# Altium PCB pico_v1.PcbDoc
Units mm, origin at the board's own origin, x right, y up, seen from the top; angles counter-clockwise.
Board outline 73.79 x 82.42 mm, 2 copper layers (Top Layer, Bottom Layer); 5 components, 40 nets, 94 pads, 12 vias.
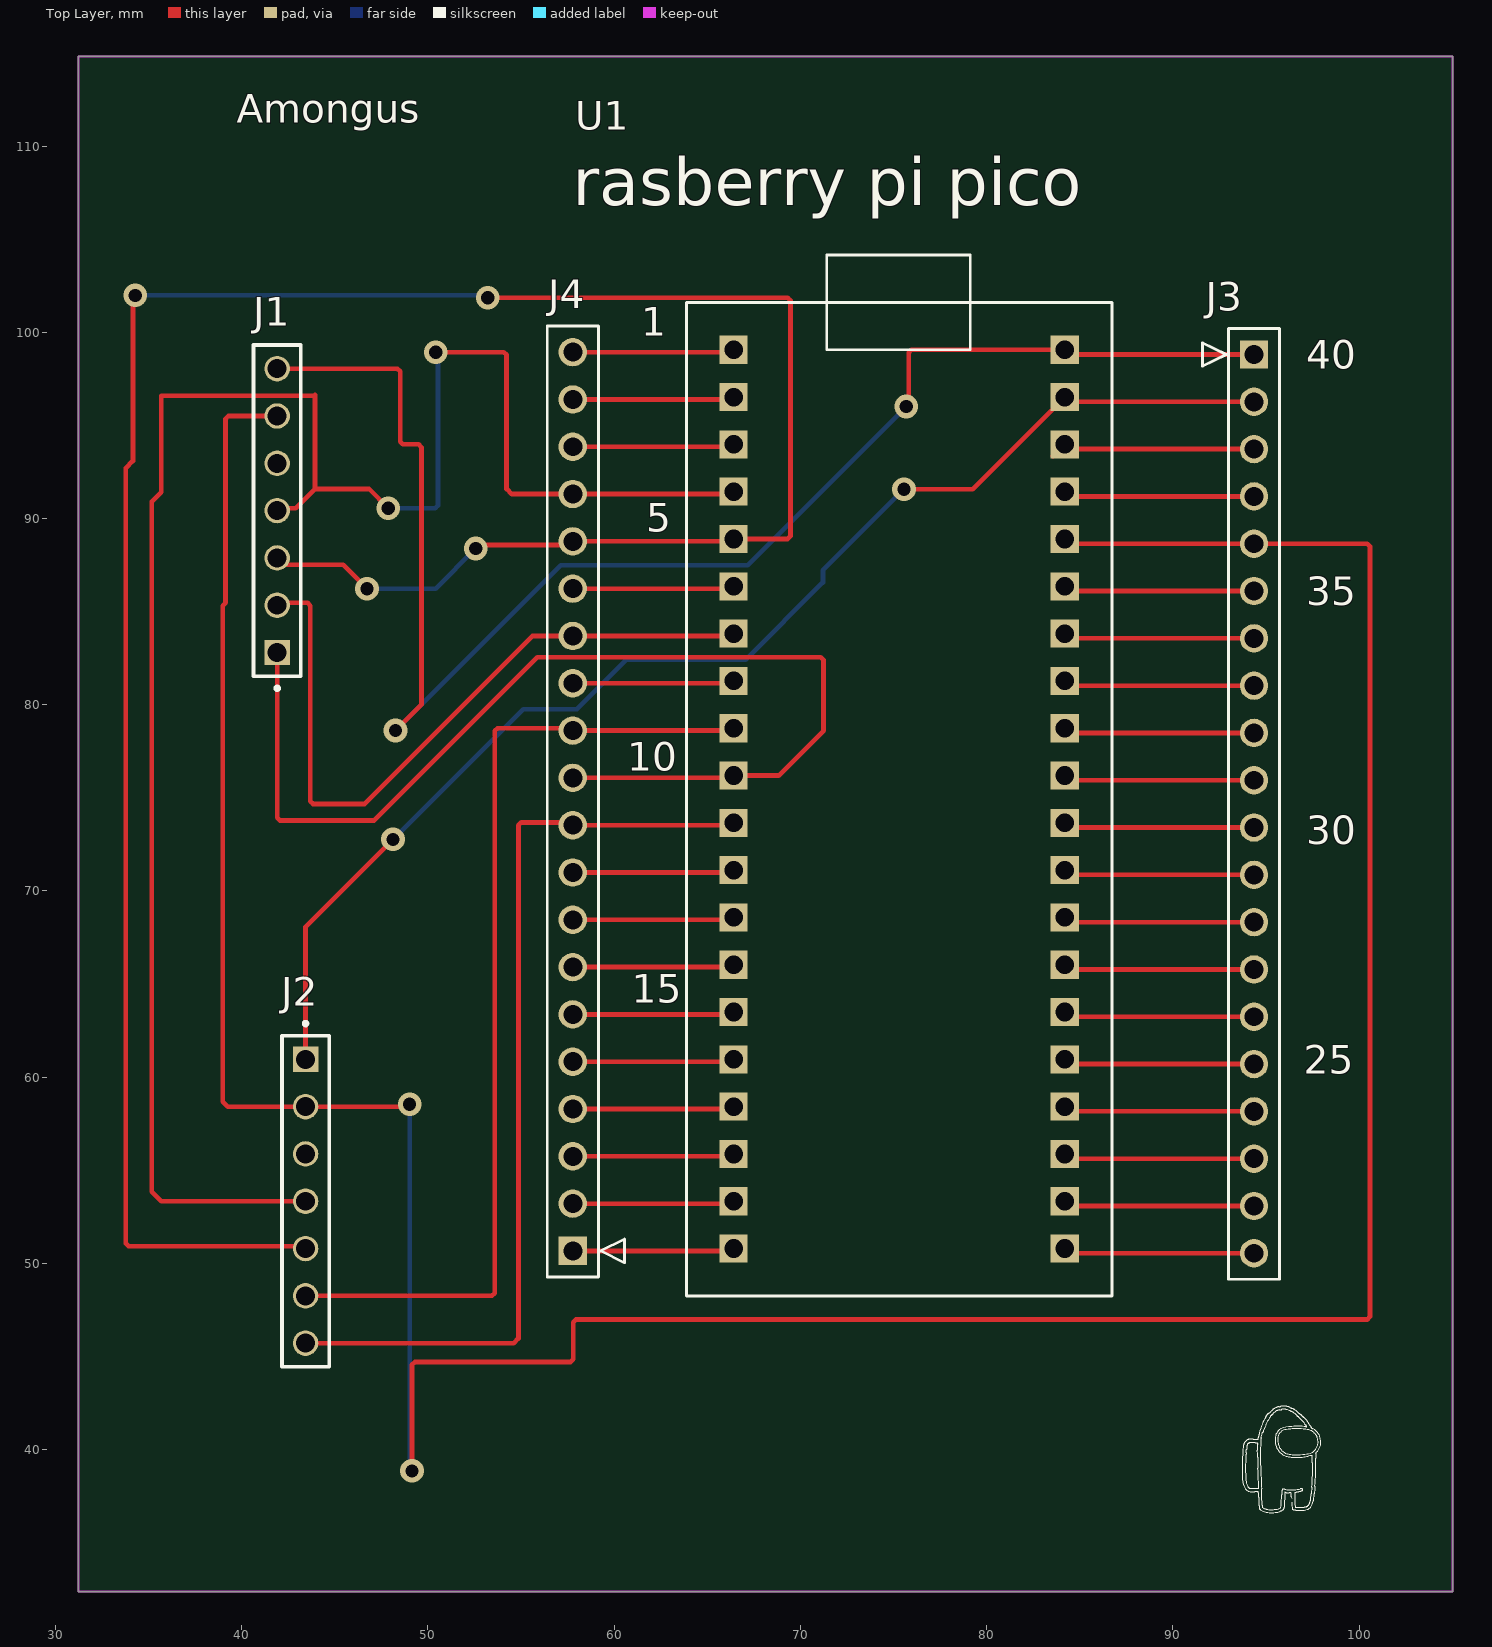
[diagram p0: Top Layer view]
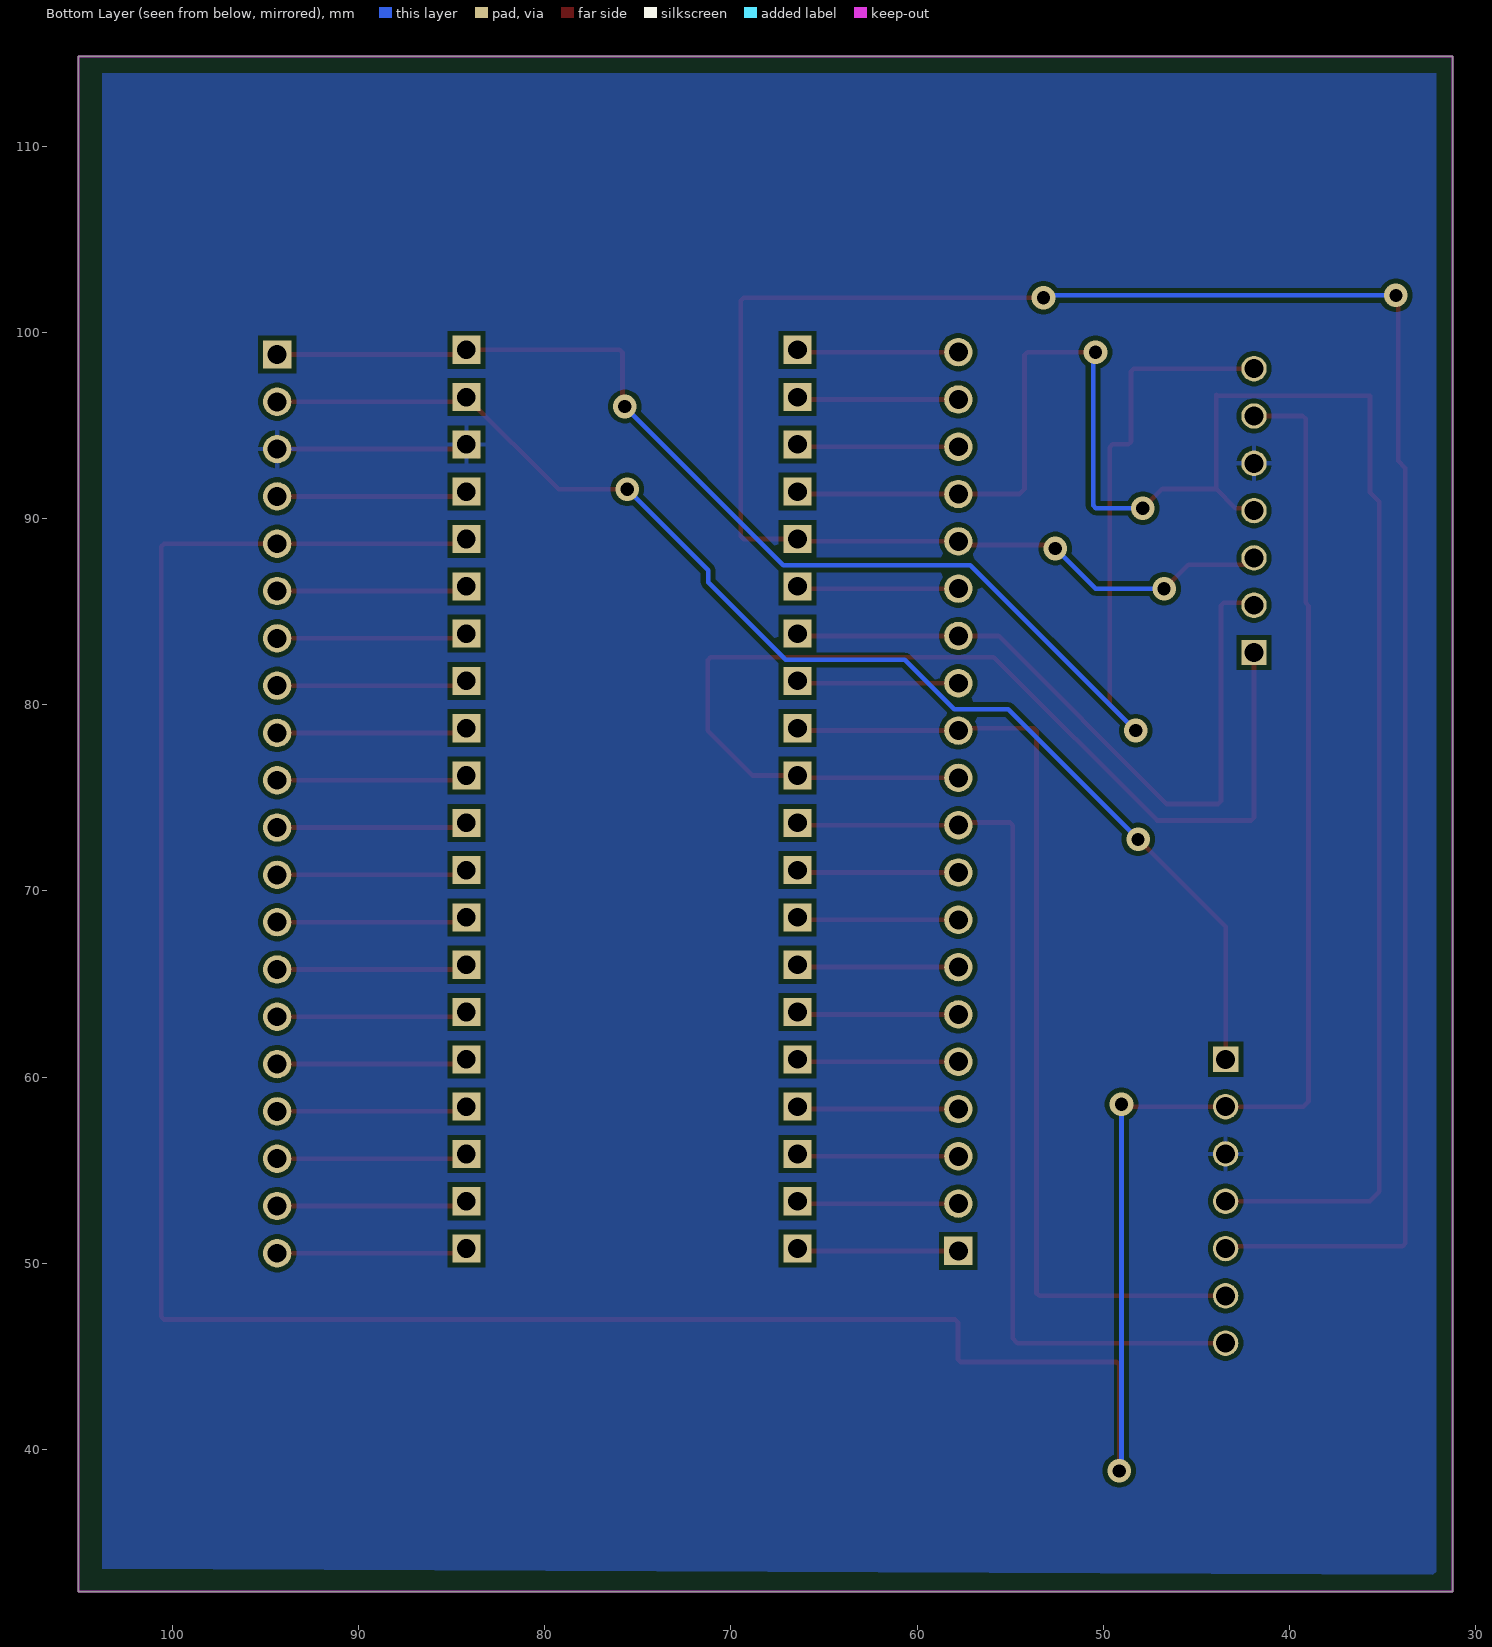
[diagram p1: Bottom Layer view, seen from below]

## Layer stack, top to bottom
Top Solder: solder mask 0.0102, Solder Resist, Dk 3.5
Top Layer: signal copper 0.0356
Dielectric 1: dielectric 0.32, FR-4, Dk 4.8
Bottom Layer: signal copper 0.0356
Bottom Solder: solder mask 0.0102, Solder Resist, Dk 3.5

## Board outline
31.242,32.385 31.242,114.808 105.029,114.808 105.029,32.385

## Design rules (kind name [scope] priority, off if disabled: settings)
Clearance [All] p1: gap=0.254 ignorepadtopadclearanceinfootprint=FALSE
PolygonConnect [All] p1: connectstyle=Relief reliefconductorwidth=0.254 reliefentries=4 polygonreliefangle="90 Angle" airgapwidth=0.254
RoutingVias [All] p1: holewidth=0.711 width=1.27 viastyle="Through Hole" minholewidth=0.711 minwidth=1.27 maxholewidth=0.711 maxwidth=1.27
SolderMaskExpansion [All] p1: expansion=0.102 istentingtop=FALSE
Width [All] p1: maxlimit=0.254 minlimit=0.254 preferedwidth=0.254
30 further rules are at their usual default settings.

## Components (designator, comment, footprint, x,y, rotation, side; value= is the part's Value field where it differs from the comment)
J1 "SS-107-T-1A" SAMTEC_SS-107-T-1A 41.91,82.804 r270 top
J2 "SS-107-T-1A" SAMTEC_SS-107-T-1A 43.434,60.96 r90 top
J3 "2041-1X20G00SA" CONN_2041-1X20xxxSx_OUP 94.361,98.806 r90 top
J4 "2041-1X20G00SA" CONN_2041-1X20xxxSx_OUP 57.785,50.673 r270 top
U1 "RASPBERRY_PI_PICO" RASPBERRY_PI_PICO 75.311,76.2 r0 top

## Footprints (in the part's own frame and the unit in brackets; to place one, negate y for a bottom-side part, rotate by r counter-clockwise, add the part's x,y. Pads: shape width x height; smd on the part's side, far side on the other; paste and mask are expansions set on the pad)
CONN_2041-1X20xxxSx_OUP [mil]
  rect 60x60 hole 40 paste-99999 mask+0: 1(0,0)
  round 60 hole 40 paste-99999 mask+0: 2(-100,0) 3(-200,0) 4(-300,0) 5(-400,0) 6(-500,0) 7(-600,0) 8(-700,0) 9(-800,0) 10(-900,0) 11(-1000,0) 12(-1100,0) 13(-1200,0) 14(-1300,0) 15(-1400,0) 16(-1500,0) 17(-1600,0) 18(-1700,0) 19(-1800,0) 20(-1900,0)
  silkscreen extent -1955,-54 55,109
RASPBERRY_PI_PICO [mm]
  rect 1.508x1.508 / inner round 1.508 / far side rect 1.508x1.508 hole 1: 3V3(8.89,12.7) 3V3_EN(8.89,15.24) ADC_VREF(8.89,10.16) AGND(8.89,5.08) GND(8.89,17.78) GND2(8.89,-7.62) GND3(8.89,-20.32) GND4(-8.89,17.78) GND5(-8.89,5.08) GND6(-8.89,-7.62) GND7(-8.89,-20.32) GP0(-8.89,22.86) GP1(-8.89,20.32) GP2(-8.89,15.24) GP3(-8.89,12.7) GP4(-8.89,10.16) GP5(-8.89,7.62) GP6(-8.89,2.54) GP7(-8.89,0) GP8(-8.89,-2.54) GP9(-8.89,-5.08) GP10(-8.89,-10.16) GP11(-8.89,-12.7) GP12(-8.89,-15.24) GP13(-8.89,-17.78) GP14(-8.89,-22.86) GP15(-8.89,-25.4) GP16(8.89,-25.4) GP17(8.89,-22.86) GP18(8.89,-17.78) GP19(8.89,-15.24) GP20(8.89,-12.7) GP21(8.89,-10.16) GP22(8.89,-5.08) GP26_A0(8.89,0) GP27_A1(8.89,2.54) GP28_A2(8.89,7.62) RUN(8.89,-2.54) VBUS(8.89,22.86) VSYS(8.89,20.32)
  silkscreen extent -11.43,-27.94 11.43,27.94, body extent -10.5,-25.5 10.5,26.8, height 3.73
SAMTEC_SS-107-T-1A [mil]
  rect 53.78x53.78 hole 40: 01(0,0)
  round 53.78 hole 40: 02(-100,0) 03(-200,0) 04(-300,0) 05(-400,0) 06(-500,0) 07(-600,0)
  silkscreen extent -650,-50 80,50

## Part data
J1 J2: Package=None, Availability=Unavailable, MP=SS-107-T-1A, Price=None
J3 J4: "Description", Manufacturer_Name=Oupiin, Copyright="Copyright (C) 2025 Ultra Librarian. All rights reserved.", Manufacturer_Part_Number=2041-1X20G00SA, RefDes=RefDes, Type=Type
U1: "Raspberry Pi Board, Arm Cortex-M0+; Core Architecture:Arm; Core Sub-Architecture:Cortex-M0+; Kit Contents:Raspberry Pi Pico Board; No. Of Bits:32Bit; Silicon Core Number:Rp2040; Silicon Manufacturer:Raspberry Pi", Package=None, Check_prices=https://www.snapeda.com/parts/RASPBERRY%20PI%20PICO/Raspberry+Pi/view-part/?ref=eda, MF="Raspberry Pi", MP="RASPBERRY PI PICO", SnapEDA_Link=https://www.snapeda.com/parts/RASPBERRY%20PI%20PICO/Raspberry+Pi/view-part/?ref=snap

## Via types
v1: diameter 1.27, hole 0.711, Top Layer to Bottom Layer, 12 vias

## Nets (pads, with @x,y where several pads share a name; then routed paths per layer and width w, separated by ;. In a path a pad name is that pad's centre, name@x,y a point inside that pad or via, vN(x,y) a via of type N, cw(c..) or ccw(c..) an arc to the next point about the centre after c; other vN are vias at no path point)
3.3: J1.06 J2.02 J3.5 U1.3V3 | length 186.8
  Top Layer w0.254: J1.06@41.975,95.504 J1.06 39.287,95.504 39.138,95.355 39.138,85.471 38.989,85.322 38.989,58.696 39.265,58.42 J2.02 48.895,58.42 v1(49.022,58.547) ; v1(49.149,38.862) 49.149,44.555 49.298,44.704 57.658,44.704 57.807,44.853 57.807,46.841 57.956,46.99 100.435,46.99 100.584,47.139 100.584,47.371 100.584,88.497 100.435,88.646 J3.5 84.455,88.646 U1.3V3
  Bottom Layer w0.254: v1(49.022,58.547) 49.022,38.989 v1(49.149,38.862)
CS1: J1.02 J4.14 U1.GP5 | length 38.8
  Top Layer w0.254: J1.02@41.996,85.471 43.539,85.471 43.688,85.322 43.688,74.825 43.837,74.676 46.609,74.676 55.626,83.693 J4.14 66.294,83.693 U1.GP5
CS2: J2.06 J4.12 U1.GP6 | length 53.4
  Top Layer w0.254: J2.06 53.445,48.26 53.594,48.409 53.594,78.591 53.743,78.74 57.658,78.74 J4.12 66.294,78.613 U1.GP6
Fault_CH1: J1.01 J4.11 U1.GP7 | length 60.4
  Top Layer w0.254: J1.01@41.91,82.923 41.91,73.936 42.059,73.787 47.117,73.787 55.88,82.55 71.098,82.55 71.247,82.401 71.247,78.613 68.834,76.2 U1.GP7 66.294,76.073 J4.11
Fault_CH2: J2.07 J4.10 U1.GP8 | length 50.8
  Top Layer w0.254: J2.07 54.61,45.72 54.864,45.974 54.864,73.533 55.013,73.682 57.636,73.682 J4.10 66.294,73.533 U1.GP8
GND: J1.05 J2.03 J3.3 U1.GND | length 11.2
  Top Layer w0.254: U1.GND@83.574,93.353 U1.GND 84.455,93.726 J3.3
MOSI: J1.03 J2.05 J4.16 U1.GP3 | length 138.1
  Top Layer w0.254: v1(34.29,101.981) 34.163,101.854 34.163,93.091 33.782,92.71 33.782,51.076 33.931,50.927 43.307,50.927 J2.05 ; J1.03@41.91,87.524 45.445,87.524 v1(46.736,86.233) ; v1(52.578,88.392) 52.768,88.582 57.594,88.582 J4.16 66.294,88.773 U1.GP3 69.32,88.9 69.469,89.049 69.469,101.705 69.32,101.854 v1(53.213,101.854)
  Bottom Layer w0.254: v1(34.29,101.981) 53.086,101.981 v1(53.213,101.854) ; v1(46.736,86.233) 50.419,86.233 v1(52.578,88.392)
NetJ3_4: J3.4 U1.3V3_EN | length 10.3
  Top Layer w0.254: U1.3V3_EN 84.455,91.186 J3.4
NetJ3_6: J3.6 U1.ADC_VREF | length 10.3
  Top Layer w0.254: U1.ADC_VREF 84.455,86.106 J3.6
NetJ3_7: J3.7 U1.GP28_A2 | length 10.3
  Top Layer w0.254: U1.GP28_A2 84.455,83.566 J3.7
NetJ3_8: J3.8 U1.AGND | length 10.3
  Top Layer w0.254: U1.AGND 84.455,81.026 J3.8
NetJ3_9: J3.9 U1.GP27_A1 | length 10.3
  Top Layer w0.254: U1.GP27_A1 84.455,78.486 J3.9
NetJ3_10: J3.10 U1.GP26_A0 | length 10.3
  Top Layer w0.254: U1.GP26_A0 84.455,75.946 J3.10
NetJ3_11: J3.11 U1.RUN | length 10.3
  Top Layer w0.254: U1.RUN 84.455,73.406 J3.11
NetJ3_12: J3.12 U1.GP22 | length 10.3
  Top Layer w0.254: U1.GP22 84.455,70.866 J3.12
NetJ3_13: J3.13 U1.GND2 | length 10.3
  Top Layer w0.254: U1.GND2 84.455,68.326 J3.13
NetJ3_14: J3.14 U1.GP21 | length 10.3
  Top Layer w0.254: U1.GP21 84.455,65.786 J3.14
NetJ3_15: J3.15 U1.GP20 | length 10.3
  Top Layer w0.254: U1.GP20 84.455,63.246 J3.15
NetJ3_16: J3.16 U1.GP19 | length 10.3
  Top Layer w0.254: U1.GP19 84.455,60.706 J3.16
NetJ3_17: J3.17 U1.GP18 | length 10.3
  Top Layer w0.254: U1.GP18 84.455,58.166 J3.17
NetJ3_18: J3.18 U1.GND3 | length 10.3
  Top Layer w0.254: U1.GND3 84.455,55.626 J3.18
NetJ3_19: J3.19 U1.GP17 | length 10.3
  Top Layer w0.254: U1.GP17 84.455,53.086 J3.19
NetJ3_20: J3.20 U1.GP16 | length 10.3
  Top Layer w0.254: U1.GP16 84.455,50.546 J3.20
NetJ4_1: J4.1 U1.GP15 | length 8.7
  Top Layer w0.254: J4.1 66.294,50.673 U1.GP15
NetJ4_2: J4.2 U1.GP14 | length 8.7
  Top Layer w0.254: J4.2 66.294,53.213 U1.GP14
NetJ4_3: J4.3 U1.GND7 | length 8.7
  Top Layer w0.254: J4.3 66.294,55.753 U1.GND7
NetJ4_4: J4.4 U1.GP13 | length 8.7
  Top Layer w0.254: J4.4 66.294,58.293 U1.GP13
NetJ4_5: J4.5 U1.GP12 | length 8.7
  Top Layer w0.254: J4.5 66.294,60.833 U1.GP12
NetJ4_6: J4.6 U1.GP11 | length 8.7
  Top Layer w0.254: J4.6 66.294,63.373 U1.GP11
NetJ4_7: J4.7 U1.GP10 | length 8.7
  Top Layer w0.254: J4.7 66.294,65.913 U1.GP10
NetJ4_8: J4.8 U1.GND6 | length 8.7
  Top Layer w0.254: J4.8 66.294,68.453 U1.GND6
NetJ4_9: J4.9 U1.GP9 | length 8.7
  Top Layer w0.254: J4.9 66.294,70.993 U1.GP9
NetJ4_13: J4.13 U1.GND5 | length 8.7
  Top Layer w0.254: J4.13 66.294,81.153 U1.GND5
NetJ4_15: J4.15 U1.GP4 | length 8.7
  Top Layer w0.254: J4.15 66.294,86.233 U1.GP4
NetJ4_18: J4.18 U1.GND4 | length 8.7
  Top Layer w0.254: J4.18 66.294,93.853 U1.GND4
NetJ4_19: J4.19 U1.GP1 | length 8.7
  Top Layer w0.254: J4.19 66.294,96.393 U1.GP1
NetJ4_20: J4.20 U1.GP0 | length 8.7
  Top Layer w0.254: J4.20 66.294,98.933 U1.GP0
SCLK: J1.04 J2.04 J4.17 U1.GP2 | length 106
  Top Layer w0.254: J1.04@41.91,90.551 42.904,90.551 43.942,91.589 ; J2.04 35.687,53.34 35.179,53.848 35.179,90.91 35.687,91.418 35.687,96.586 43.881,96.586 43.942,96.647 43.942,91.589 ; v1(47.879,90.551) 46.841,91.589 43.942,91.589 ; v1(50.419,98.933) 54.08,98.933 54.229,98.784 54.229,91.589 54.505,91.313 J4.17 66.294,91.313 U1.GP2
  Bottom Layer w0.254: v1(47.879,90.551) 50.397,90.551 50.546,90.7 50.546,98.806 v1(50.419,98.933)
Vbus: J1.07 J3.1 U1.VBUS | length 83.8
  Top Layer w0.254: J1.07 48.365,98.044 48.514,97.895 48.514,94.129 48.663,93.98 49.508,93.98 49.657,93.831 49.657,80.01 v1(48.26,78.613) ; v1(75.692,96.012) 75.819,96.139 75.819,98.911 75.968,99.06 U1.VBUS 84.455,98.806 J3.1
  Bottom Layer w0.254: v1(48.26,78.613) 57.142,87.495 67.175,87.495 v1(75.692,96.012)
Vsys: J2.01 J3.2 U1.VSYS | length 70.3
  Top Layer w0.254: J2.01 43.434,68.072 v1(48.133,72.771) ; v1(75.565,91.567) 79.248,91.567 U1.VSYS 84.455,96.266 J3.2
  Bottom Layer w0.254: v1(48.133,72.771) 55.118,79.756 58.004,79.756 60.663,82.415 67.063,82.415 71.217,86.569 71.217,87.219 v1(75.565,91.567)

## Polygon pours and split planes (outlines as drawn)
GND on Bottom Layer "GND_L02_P000" (solid, pour order 0): 32.131,113.919 103.759,113.919 103.759,33.612 32.131,33.274

## Keep-outs
Keep-Out Layer:
  lines w0.1: 31.242,32.385 105.029,32.385 ; 31.242,32.385 31.242,114.808 ; 31.242,32.385 105.029,32.385 ; 31.242,32.385 31.242,114.808 ; 31.242,114.808 105.029,114.808 ; 31.242,114.808 105.029,114.808 ; 105.029,32.385 105.029,114.808 ; 105.029,32.385 105.029,114.808

## Silkscreen, mask and mechanical layers (free items; w line width, h text height)
Top Overlay:
  drawing of 543 lines, arcs and shapes, not listed
  text "Amongus" at 39.751,111.252 h1.52
  text "1" at 61.468,99.822 h1.52
  text "40" at 97.155,98.044 h1.52
  text "5" at 61.722,89.281 h1.52
  text "35" at 97.155,85.344 h1.52
  text "10" at 60.706,76.454 h1.52
  text "30" at 97.155,72.517 h1.52
  text "15" at 60.96,64.008 h1.52
  text "25" at 97.028,60.198 h1.52

## Text inside footprints (layer, text, board x,y; h text height)
U1: Top Overlay "rasberry pi pico" at 57.785,106.807 h2.54